# EAGLE board Configurable_RC_Filter-Panel (EAGLE 9.5.2), part 1 of 2
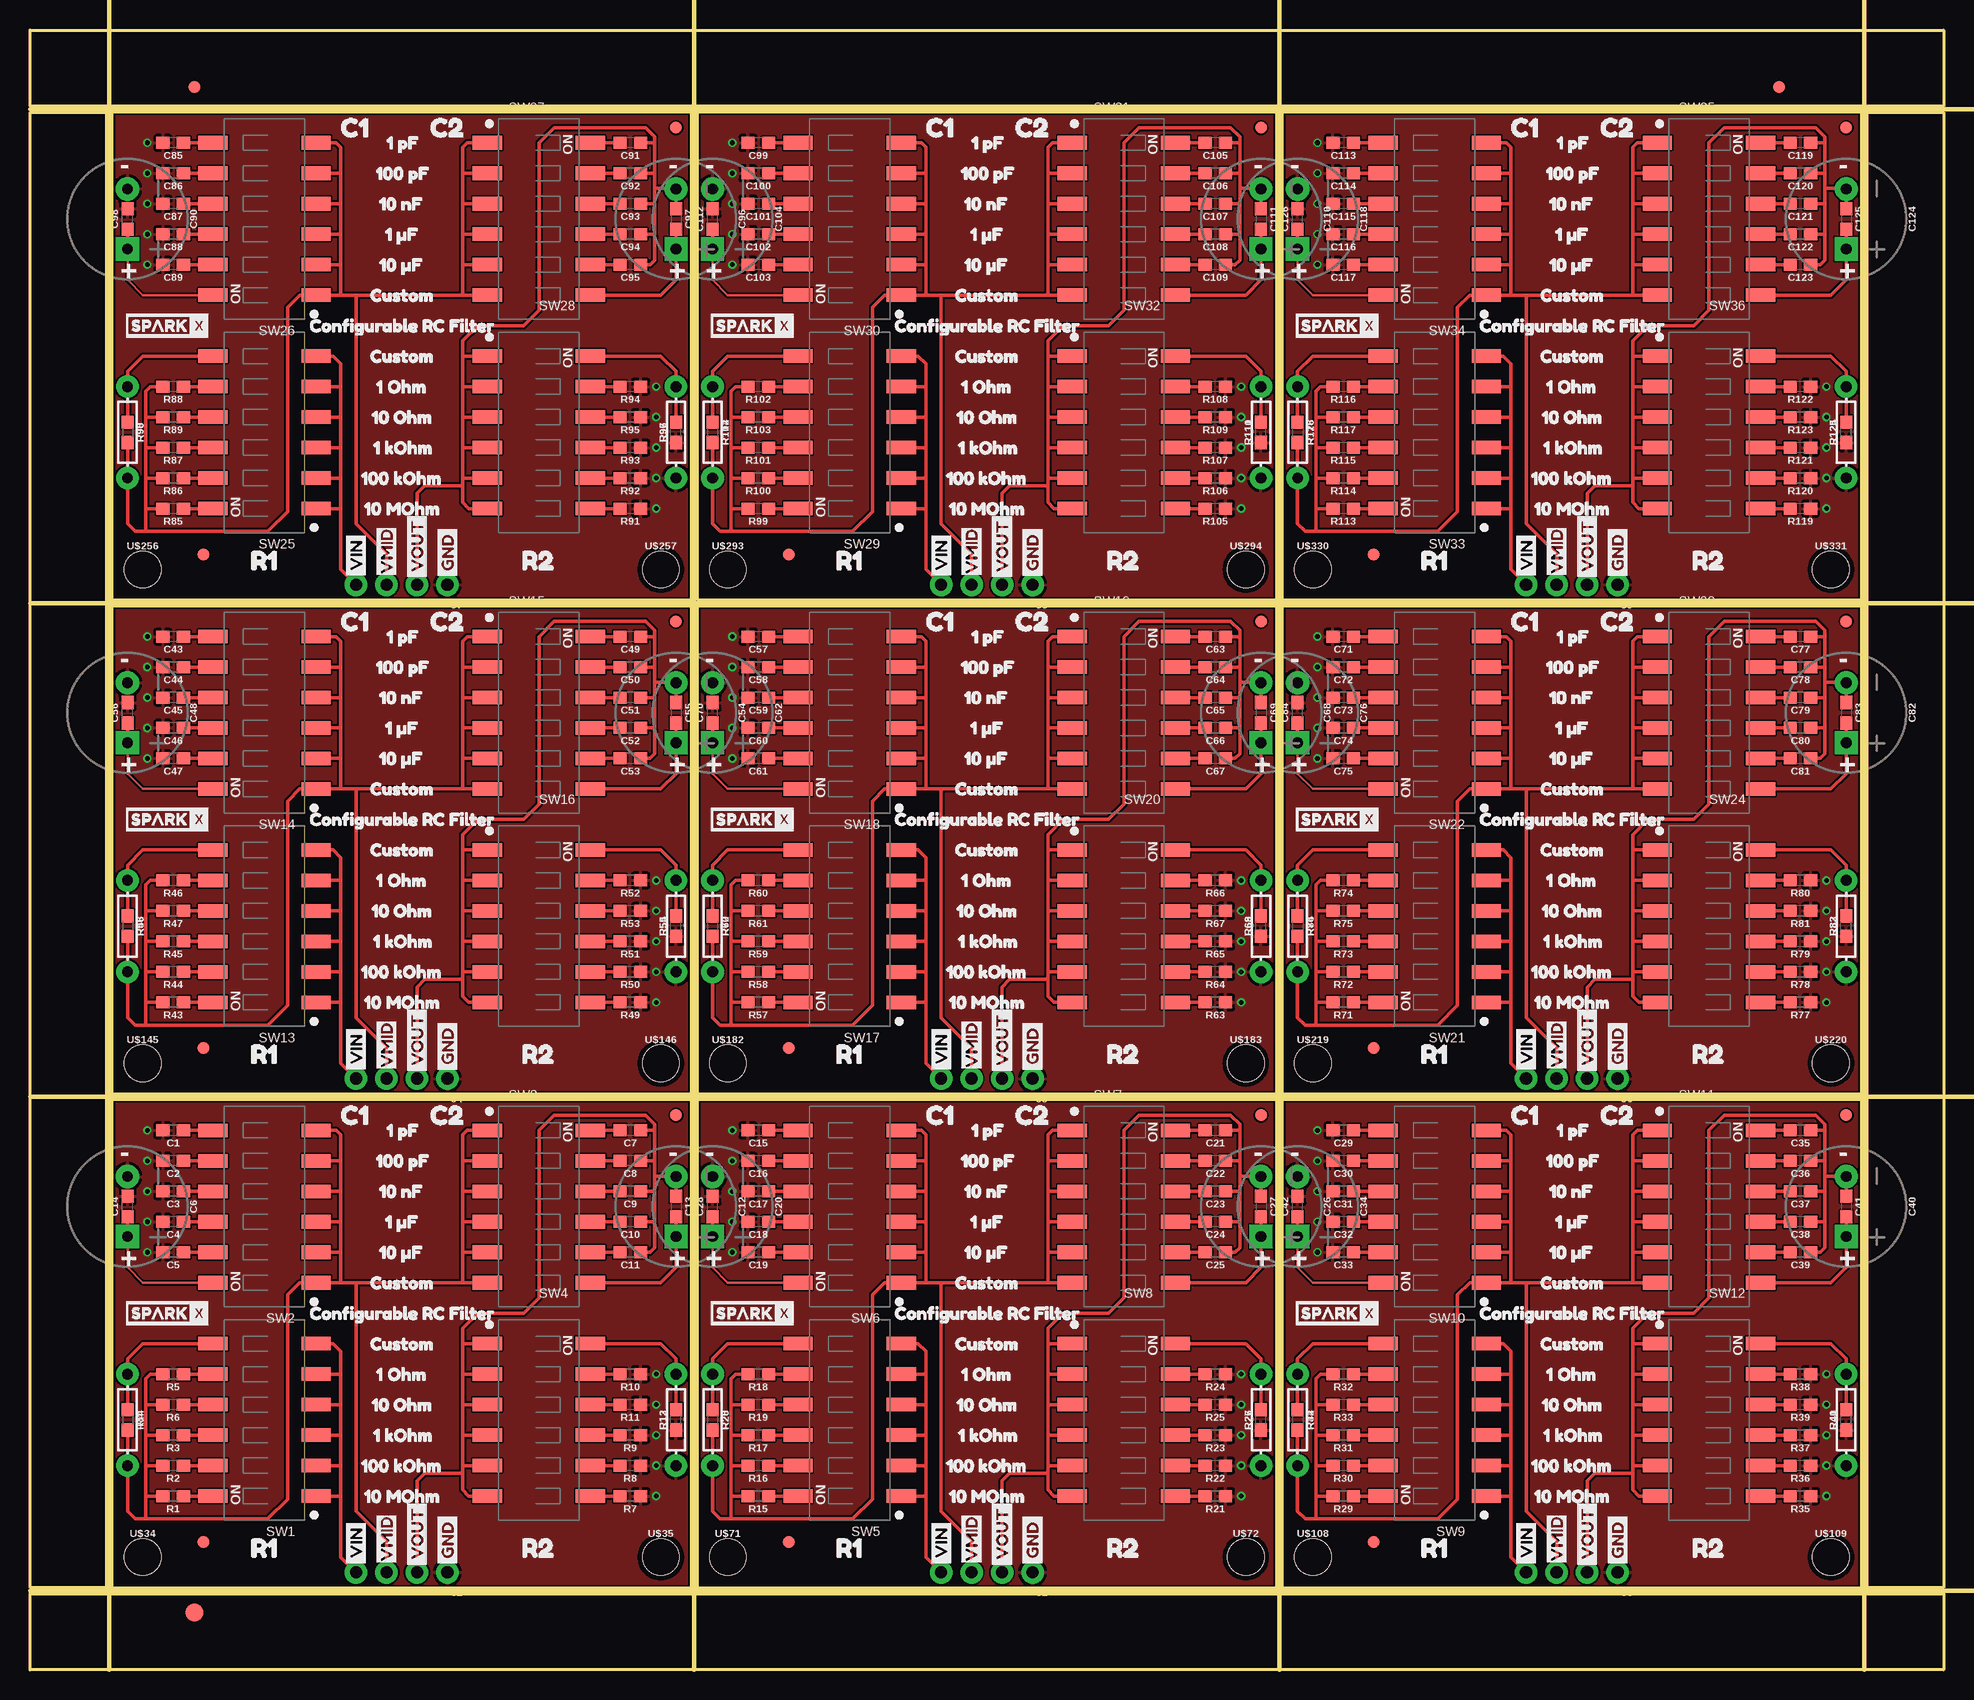
[diagram p0: board, top side]
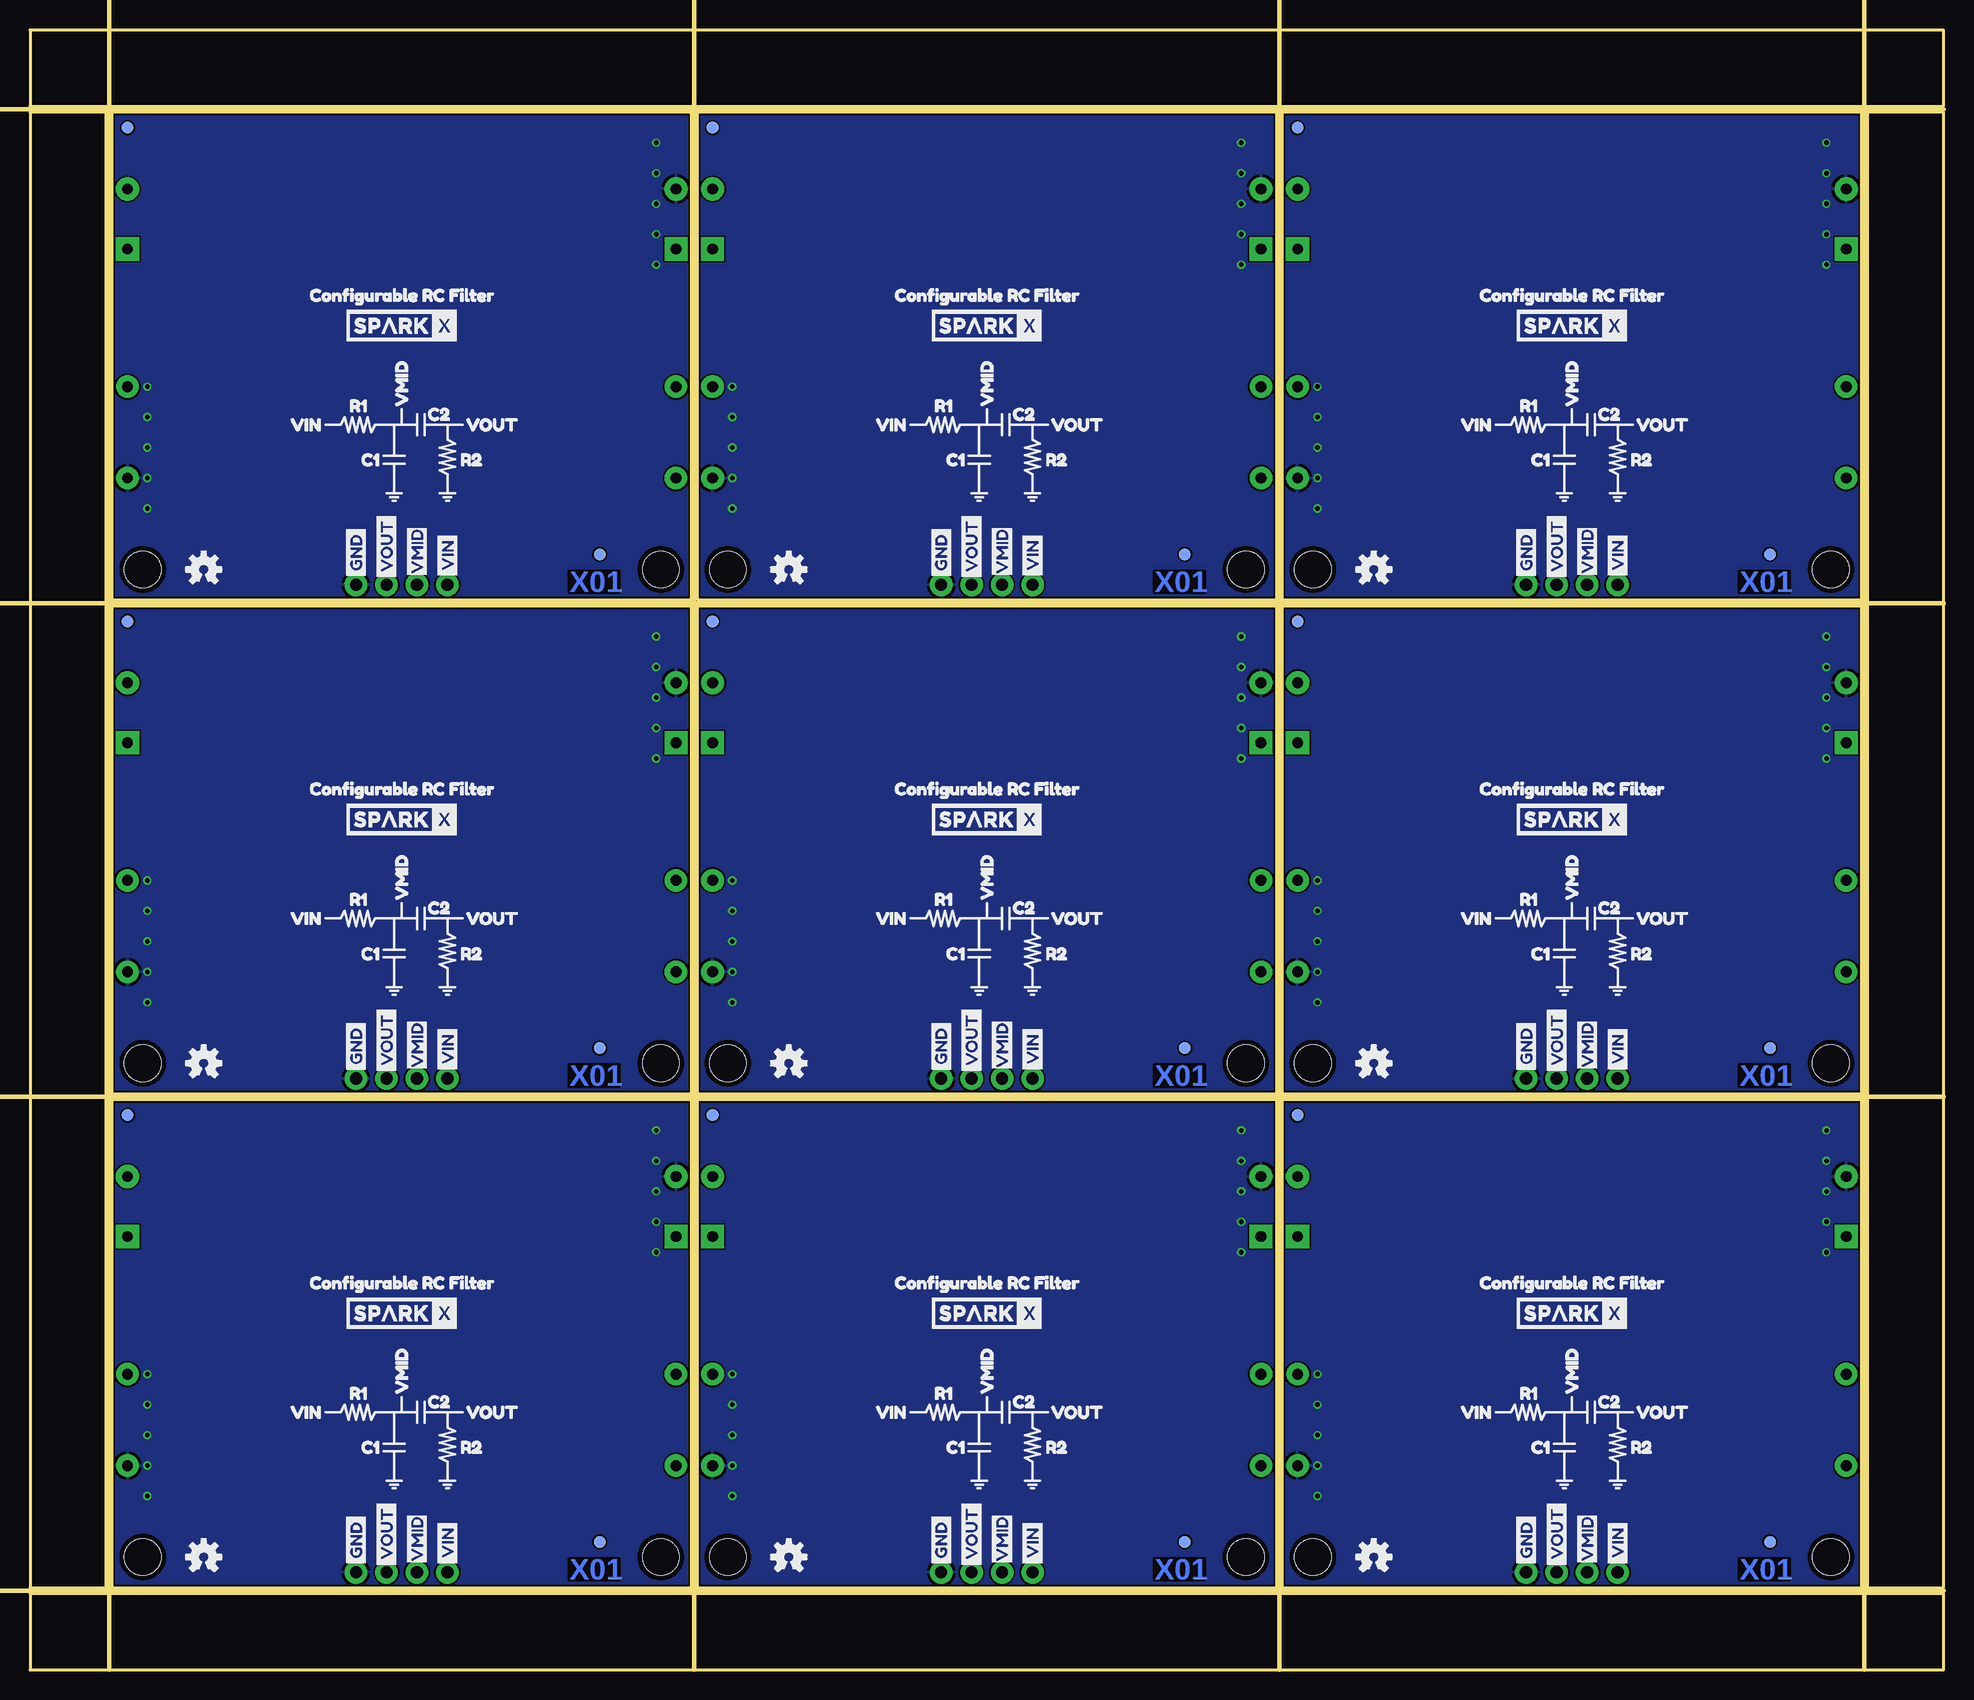
[diagram p1: board, bottom side, seen from below]

Size 159.51 x 136.65 mm. Coordinates in mm from the lower left corner, seen from the top.
Outline: 6.86,6.86 55.12,6.86 55.12,47.5 6.87,47.5 6.86,6.86
Outline: 55.63,6.86 103.89,6.86 103.89,47.5 55.64,47.5 55.63,6.86
Outline: 104.39,6.86 152.65,6.86 152.65,47.5 104.4,47.5 104.39,6.86
Outline: 6.86,48.01 55.12,48.01 55.12,88.65 6.87,88.65 6.86,48.01
Outline: 55.63,48.01 103.89,48.01 103.89,88.65 55.64,88.65 55.63,48.01
Outline: 104.39,48.01 152.65,48.01 152.65,88.65 104.4,88.65 104.39,48.01
Outline: 6.86,89.15 55.12,89.15 55.12,129.79 6.87,129.79 6.86,89.15
Outline: 55.63,89.15 103.89,89.15 103.89,129.79 55.64,129.79 55.63,89.15
Outline: 104.39,89.15 152.65,89.15 152.65,129.79 104.4,129.79 104.39,89.15
Outline: 0,6.35 159.51,6.35 159.51,0 0,0 0,6.35
Outline: 153.16,129.79 159.51,129.79 159.51,6.86 153.16,6.86 153.16,129.79
Outline: 0,136.65 159.51,136.65 159.51,130.3 0,130.3 0,136.65
Outline: 0,129.79 6.35,129.79 6.35,6.86 0,6.86 0,129.79
Copper layers (1*16): Top 0.035mm / dielectric 1.5mm / Bottom 0.035mm
Design rules "SparkFun-2-layer-PCBWay-LIMIT": minimum track width 6mil, minimum drill 0.3mm, track to track 6mil, track to pad 6mil, pad to pad 6mil, via to via 6mil, smd to smd 6mil, copper to edge 6mil, drill to drill 6mil, minimum pad ring 6mil, minimum via ring 6mil, stop-mask expansion 4mil, vias tented up to drill 25mil, thermal gap 10mil
Milling: 8 lines

## Footprints (pad centres in the part's own frame; a part is rotated, then mirrored left to right if it is on the bottom)
0603 = smd 1.1 x 1: 1 -0.85,0; 2 0.85,0
CPOL-RADIAL-5MM-10MM-NS = drill 0.9 pad 1.93 square: + 2.5,0 | drill 0.9 pad 1.93: - -2.5,0
FIDUCIAL-1X2 = smd 1 x 1: 1 0,0
FIDUCIAL-1.5X3 = smd 1.5 x 1.5: 1 0,0
1X04_NO_SILK = drill 1.016 pad 1.88: 1 0,0; 2 2.54,0; 3 5.08,0; 4 7.62,0
AXIAL-0.3 = drill 0.9 pad 1.88: P$1 -3.81,0; P$2 3.81,0
DIPSWITCH-06-SMD = smd 1.13 x 2.44: 1 -6.35,-4.3; 2 -3.81,-4.3; 3 -1.27,-4.3; 4 1.27,-4.3; 5 3.81,-4.3; 6 6.35,-4.3; 7 6.35,4.3; 8 3.81,4.3; 9 1.27,4.3; 10 -1.27,4.3; 11 -3.81,4.3; 12 -6.35,4.3
STAND-OFF-TIGHT = hole 3.048: 0,0

## Placement (x,y rotation side)
C1  1.0pF  [0603]  11.94,44.96 180 top
C2  100pF  [0603]  11.94,42.42 180 top
C3  10nF  [0603]  11.94,39.88 180 top
C4  1.0uF  [0603]  11.94,37.34 180 top
C5  10uF  [0603]  11.94,34.8 180 top
C6  1000UF-RADIAL-5MM-25V-20%-NO-SILK  [CPOL-RADIAL-5MM-10MM-NS]  8.13,38.61 270 top
C7  1.0pF  [0603]  50.04,44.96 180 top
C8  100pF  [0603]  50.04,42.42 180 top
C9  10nF  [0603]  50.04,39.88 180 top
C10  1.0uF  [0603]  50.04,37.34 180 top
C11  10uF  [0603]  50.04,34.8 180 top
C12  1000UF-RADIAL-5MM-25V-20%-NO-SILK  [CPOL-RADIAL-5MM-10MM-NS]  53.85,38.61 270 top
C13  [0603]  53.85,38.61 270 top
C14  [0603]  8.13,38.61 90 top
C15  1.0pF  [0603]  60.71,44.96 180 top
C16  100pF  [0603]  60.71,42.42 180 top
C17  10nF  [0603]  60.71,39.88 180 top
C18  1.0uF  [0603]  60.71,37.34 180 top
C19  10uF  [0603]  60.71,34.8 180 top
C20  1000UF-RADIAL-5MM-25V-20%-NO-SILK  [CPOL-RADIAL-5MM-10MM-NS]  56.9,38.61 270 top
C21  1.0pF  [0603]  98.81,44.96 180 top
C22  100pF  [0603]  98.81,42.42 180 top
C23  10nF  [0603]  98.81,39.88 180 top
C24  1.0uF  [0603]  98.81,37.34 180 top
C25  10uF  [0603]  98.81,34.8 180 top
C26  1000UF-RADIAL-5MM-25V-20%-NO-SILK  [CPOL-RADIAL-5MM-10MM-NS]  102.62,38.61 270 top
C27  [0603]  102.62,38.61 270 top
C28  [0603]  56.9,38.61 90 top
C29  1.0pF  [0603]  109.47,44.96 180 top
C30  100pF  [0603]  109.47,42.42 180 top
C31  10nF  [0603]  109.47,39.88 180 top
C32  1.0uF  [0603]  109.47,37.34 180 top
C33  10uF  [0603]  109.47,34.8 180 top
C34  1000UF-RADIAL-5MM-25V-20%-NO-SILK  [CPOL-RADIAL-5MM-10MM-NS]  105.66,38.61 270 top
C35  1.0pF  [0603]  147.57,44.96 180 top
C36  100pF  [0603]  147.57,42.42 180 top
C37  10nF  [0603]  147.57,39.88 180 top
C38  1.0uF  [0603]  147.57,37.34 180 top
C39  10uF  [0603]  147.57,34.8 180 top
C40  1000UF-RADIAL-5MM-25V-20%-NO-SILK  [CPOL-RADIAL-5MM-10MM-NS]  151.38,38.61 270 top
C41  [0603]  151.38,38.61 270 top
C42  [0603]  105.66,38.61 90 top
C43  1.0pF  [0603]  11.94,86.11 180 top
C44  100pF  [0603]  11.94,83.57 180 top
C45  10nF  [0603]  11.94,81.03 180 top
C46  1.0uF  [0603]  11.94,78.49 180 top
C47  10uF  [0603]  11.94,75.95 180 top
C48  1000UF-RADIAL-5MM-25V-20%-NO-SILK  [CPOL-RADIAL-5MM-10MM-NS]  8.13,79.76 270 top
C49  1.0pF  [0603]  50.04,86.11 180 top
C50  100pF  [0603]  50.04,83.57 180 top
C51  10nF  [0603]  50.04,81.03 180 top
C52  1.0uF  [0603]  50.04,78.49 180 top
C53  10uF  [0603]  50.04,75.95 180 top
C54  1000UF-RADIAL-5MM-25V-20%-NO-SILK  [CPOL-RADIAL-5MM-10MM-NS]  53.85,79.76 270 top
C55  [0603]  53.85,79.76 270 top
C56  [0603]  8.13,79.76 90 top
C57  1.0pF  [0603]  60.71,86.11 180 top
C58  100pF  [0603]  60.71,83.57 180 top
C59  10nF  [0603]  60.71,81.03 180 top
C60  1.0uF  [0603]  60.71,78.49 180 top
C61  10uF  [0603]  60.71,75.95 180 top
C62  1000UF-RADIAL-5MM-25V-20%-NO-SILK  [CPOL-RADIAL-5MM-10MM-NS]  56.9,79.76 270 top
C63  1.0pF  [0603]  98.81,86.11 180 top
C64  100pF  [0603]  98.81,83.57 180 top
C65  10nF  [0603]  98.81,81.03 180 top
C66  1.0uF  [0603]  98.81,78.49 180 top
C67  10uF  [0603]  98.81,75.95 180 top
C68  1000UF-RADIAL-5MM-25V-20%-NO-SILK  [CPOL-RADIAL-5MM-10MM-NS]  102.62,79.76 270 top
C69  [0603]  102.62,79.76 270 top
C70  [0603]  56.9,79.76 90 top
C71  1.0pF  [0603]  109.47,86.11 180 top
C72  100pF  [0603]  109.47,83.57 180 top
C73  10nF  [0603]  109.47,81.03 180 top
C74  1.0uF  [0603]  109.47,78.49 180 top
C75  10uF  [0603]  109.47,75.95 180 top
C76  1000UF-RADIAL-5MM-25V-20%-NO-SILK  [CPOL-RADIAL-5MM-10MM-NS]  105.66,79.76 270 top
C77  1.0pF  [0603]  147.57,86.11 180 top
C78  100pF  [0603]  147.57,83.57 180 top
C79  10nF  [0603]  147.57,81.03 180 top
C80  1.0uF  [0603]  147.57,78.49 180 top
C81  10uF  [0603]  147.57,75.95 180 top
C82  1000UF-RADIAL-5MM-25V-20%-NO-SILK  [CPOL-RADIAL-5MM-10MM-NS]  151.38,79.76 270 top
C83  [0603]  151.38,79.76 270 top
C84  [0603]  105.66,79.76 90 top
C85  1.0pF  [0603]  11.94,127.25 180 top
C86  100pF  [0603]  11.94,124.71 180 top
C87  10nF  [0603]  11.94,122.17 180 top
C88  1.0uF  [0603]  11.94,119.63 180 top
C89  10uF  [0603]  11.94,117.09 180 top
C90  1000UF-RADIAL-5MM-25V-20%-NO-SILK  [CPOL-RADIAL-5MM-10MM-NS]  8.13,120.9 270 top
C91  1.0pF  [0603]  50.04,127.25 180 top
C92  100pF  [0603]  50.04,124.71 180 top
C93  10nF  [0603]  50.04,122.17 180 top
C94  1.0uF  [0603]  50.04,119.63 180 top
C95  10uF  [0603]  50.04,117.09 180 top
C96  1000UF-RADIAL-5MM-25V-20%-NO-SILK  [CPOL-RADIAL-5MM-10MM-NS]  53.85,120.9 270 top
C97  [0603]  53.85,120.9 270 top
C98  [0603]  8.13,120.9 90 top
C99  1.0pF  [0603]  60.71,127.25 180 top
C100  100pF  [0603]  60.71,124.71 180 top
C101  10nF  [0603]  60.71,122.17 180 top
C102  1.0uF  [0603]  60.71,119.63 180 top
C103  10uF  [0603]  60.71,117.09 180 top
C104  1000UF-RADIAL-5MM-25V-20%-NO-SILK  [CPOL-RADIAL-5MM-10MM-NS]  56.9,120.9 270 top
C105  1.0pF  [0603]  98.81,127.25 180 top
C106  100pF  [0603]  98.81,124.71 180 top
C107  10nF  [0603]  98.81,122.17 180 top
C108  1.0uF  [0603]  98.81,119.63 180 top
C109  10uF  [0603]  98.81,117.09 180 top
C110  1000UF-RADIAL-5MM-25V-20%-NO-SILK  [CPOL-RADIAL-5MM-10MM-NS]  102.62,120.9 270 top
C111  [0603]  102.62,120.9 270 top
C112  [0603]  56.9,120.9 90 top
C113  1.0pF  [0603]  109.47,127.25 180 top
C114  100pF  [0603]  109.47,124.71 180 top
C115  10nF  [0603]  109.47,122.17 180 top
C116  1.0uF  [0603]  109.47,119.63 180 top
C117  10uF  [0603]  109.47,117.09 180 top
C118  1000UF-RADIAL-5MM-25V-20%-NO-SILK  [CPOL-RADIAL-5MM-10MM-NS]  105.66,120.9 270 top
C119  1.0pF  [0603]  147.57,127.25 180 top
C120  100pF  [0603]  147.57,124.71 180 top
C121  10nF  [0603]  147.57,122.17 180 top
C122  1.0uF  [0603]  147.57,119.63 180 top
C123  10uF  [0603]  147.57,117.09 180 top
C124  1000UF-RADIAL-5MM-25V-20%-NO-SILK  [CPOL-RADIAL-5MM-10MM-NS]  151.38,120.9 270 top
C125  [0603]  151.38,120.9 270 top
C126  [0603]  105.66,120.9 90 top
E$1  [FIDUCIAL-1X2]  13.72,131.89 0 top
E$2  [FIDUCIAL-1X2]  145.8,131.89 0 top
E$3  [FIDUCIAL-1.5X3]  13.72,4.76 0 top
FD1  FIDUCIAL1X2  [FIDUCIAL-1X2]  14.48,10.67 0 top
FD2  FIDUCIAL1X2  [FIDUCIAL-1X2]  14.48,10.67 0 bottom
FD3  FIDUCIAL1X2  [FIDUCIAL-1X2]  53.85,46.23 0 top
FD4  FIDUCIAL1X2  [FIDUCIAL-1X2]  53.85,46.23 0 bottom
FD5  FIDUCIAL1X2  [FIDUCIAL-1X2]  63.25,10.67 0 top
FD6  FIDUCIAL1X2  [FIDUCIAL-1X2]  63.25,10.67 0 bottom
FD7  FIDUCIAL1X2  [FIDUCIAL-1X2]  102.62,46.23 0 top
FD8  FIDUCIAL1X2  [FIDUCIAL-1X2]  102.62,46.23 0 bottom
FD9  FIDUCIAL1X2  [FIDUCIAL-1X2]  112.01,10.67 0 top
FD10  FIDUCIAL1X2  [FIDUCIAL-1X2]  112.01,10.67 0 bottom
FD11  FIDUCIAL1X2  [FIDUCIAL-1X2]  151.38,46.23 0 top
FD12  FIDUCIAL1X2  [FIDUCIAL-1X2]  151.38,46.23 0 bottom
FD13  FIDUCIAL1X2  [FIDUCIAL-1X2]  14.48,51.82 0 top
FD14  FIDUCIAL1X2  [FIDUCIAL-1X2]  14.48,51.82 0 bottom
FD15  FIDUCIAL1X2  [FIDUCIAL-1X2]  53.85,87.38 0 top
FD16  FIDUCIAL1X2  [FIDUCIAL-1X2]  53.85,87.38 0 bottom
FD17  FIDUCIAL1X2  [FIDUCIAL-1X2]  63.25,51.82 0 top
FD18  FIDUCIAL1X2  [FIDUCIAL-1X2]  63.25,51.82 0 bottom
FD19  FIDUCIAL1X2  [FIDUCIAL-1X2]  102.62,87.38 0 top
FD20  FIDUCIAL1X2  [FIDUCIAL-1X2]  102.62,87.38 0 bottom
FD21  FIDUCIAL1X2  [FIDUCIAL-1X2]  112.01,51.82 0 top
FD22  FIDUCIAL1X2  [FIDUCIAL-1X2]  112.01,51.82 0 bottom
FD23  FIDUCIAL1X2  [FIDUCIAL-1X2]  151.38,87.38 0 top
FD24  FIDUCIAL1X2  [FIDUCIAL-1X2]  151.38,87.38 0 bottom
FD25  FIDUCIAL1X2  [FIDUCIAL-1X2]  14.48,92.96 0 top
FD26  FIDUCIAL1X2  [FIDUCIAL-1X2]  14.48,92.96 0 bottom
FD27  FIDUCIAL1X2  [FIDUCIAL-1X2]  53.85,128.52 0 top
FD28  FIDUCIAL1X2  [FIDUCIAL-1X2]  53.85,128.52 0 bottom
FD29  FIDUCIAL1X2  [FIDUCIAL-1X2]  63.25,92.96 0 top
FD30  FIDUCIAL1X2  [FIDUCIAL-1X2]  63.25,92.96 0 bottom
FD31  FIDUCIAL1X2  [FIDUCIAL-1X2]  102.62,128.52 0 top
FD32  FIDUCIAL1X2  [FIDUCIAL-1X2]  102.62,128.52 0 bottom
FD33  FIDUCIAL1X2  [FIDUCIAL-1X2]  112.01,92.96 0 top
FD34  FIDUCIAL1X2  [FIDUCIAL-1X2]  112.01,92.96 0 bottom
FD35  FIDUCIAL1X2  [FIDUCIAL-1X2]  151.38,128.52 0 top
FD36  FIDUCIAL1X2  [FIDUCIAL-1X2]  151.38,128.52 0 bottom
J1  [1X04_NO_SILK]  34.8,8.13 180 top
J2  [1X04_NO_SILK]  83.57,8.13 180 top
J3  [1X04_NO_SILK]  132.33,8.13 180 top
J4  [1X04_NO_SILK]  34.8,49.28 180 top
J5  [1X04_NO_SILK]  83.57,49.28 180 top
J6  [1X04_NO_SILK]  132.33,49.28 180 top
J7  [1X04_NO_SILK]  34.8,90.42 180 top
J8  [1X04_NO_SILK]  83.57,90.42 180 top
J9  [1X04_NO_SILK]  132.33,90.42 180 top
LOGO1  OSHW-LOGOS  [OSHW-LOGO-S]  47.5,9.4 0 bottom
LOGO2  OSHW-LOGOS  [OSHW-LOGO-S]  96.27,9.4 0 bottom
LOGO3  OSHW-LOGOS  [OSHW-LOGO-S]  145.03,9.4 0 bottom
LOGO4  OSHW-LOGOS  [OSHW-LOGO-S]  47.5,50.55 0 bottom
LOGO5  OSHW-LOGOS  [OSHW-LOGO-S]  96.27,50.55 0 bottom
LOGO6  OSHW-LOGOS  [OSHW-LOGO-S]  145.03,50.55 0 bottom
LOGO7  OSHW-LOGOS  [OSHW-LOGO-S]  47.5,91.69 0 bottom
LOGO8  OSHW-LOGOS  [OSHW-LOGO-S]  96.27,91.69 0 bottom
LOGO9  OSHW-LOGOS  [OSHW-LOGO-S]  145.03,91.69 0 bottom
R1  10M  [0603]  11.94,14.48 180 top
R2  100k  [0603]  11.94,17.02 180 top
R3  1k  [0603]  11.94,19.56 180 top
R4  [AXIAL-0.3]  8.13,20.83 270 top
R5  1  [0603]  11.94,24.64 180 top
R6  10  [0603]  11.94,22.1 180 top
R7  10M  [0603]  50.04,14.48 180 top
R8  100k  [0603]  50.04,17.02 180 top
R9  1k  [0603]  50.04,19.56 180 top
R10  1  [0603]  50.04,24.64 180 top
R11  10  [0603]  50.04,22.1 180 top
R12  [AXIAL-0.3]  53.85,20.83 90 top
R13  [0603]  53.85,20.83 90 top
R14  [0603]  8.13,20.83 270 top
R15  10M  [0603]  60.71,14.48 180 top
R16  100k  [0603]  60.71,17.02 180 top
R17  1k  [0603]  60.71,19.56 180 top
R18  1  [0603]  60.71,24.64 180 top
R19  10  [0603]  60.71,22.1 180 top
R20  [AXIAL-0.3]  56.9,20.83 270 top
R21  10M  [0603]  98.81,14.48 180 top
R22  100k  [0603]  98.81,17.02 180 top
R23  1k  [0603]  98.81,19.56 180 top
R24  1  [0603]  98.81,24.64 180 top
R25  10  [0603]  98.81,22.1 180 top
R26  [AXIAL-0.3]  102.62,20.83 90 top
R27  [0603]  102.62,20.83 90 top
R28  [0603]  56.9,20.83 270 top
R29  10M  [0603]  109.47,14.48 180 top
R30  100k  [0603]  109.47,17.02 180 top
R31  1k  [0603]  109.47,19.56 180 top
R32  1  [0603]  109.47,24.64 180 top
R33  10  [0603]  109.47,22.1 180 top
R34  [AXIAL-0.3]  105.66,20.83 270 top
R35  10M  [0603]  147.57,14.48 180 top
R36  100k  [0603]  147.57,17.02 180 top
R37  1k  [0603]  147.57,19.56 180 top
R38  1  [0603]  147.57,24.64 180 top
R39  10  [0603]  147.57,22.1 180 top
R40  [AXIAL-0.3]  151.38,20.83 90 top
R41  [0603]  151.38,20.83 90 top
R42  [0603]  105.66,20.83 270 top
R43  10M  [0603]  11.94,55.63 180 top
R44  100k  [0603]  11.94,58.17 180 top
R45  1k  [0603]  11.94,60.71 180 top
R46  1  [0603]  11.94,65.79 180 top
R47  10  [0603]  11.94,63.25 180 top
R48  [AXIAL-0.3]  8.13,61.98 270 top
R49  10M  [0603]  50.04,55.63 180 top
R50  100k  [0603]  50.04,58.17 180 top
R51  1k  [0603]  50.04,60.71 180 top
R52  1  [0603]  50.04,65.79 180 top
R53  10  [0603]  50.04,63.25 180 top
R54  [AXIAL-0.3]  53.85,61.98 90 top
R55  [0603]  53.85,61.98 90 top
R56  [0603]  8.13,61.98 270 top
R57  10M  [0603]  60.71,55.63 180 top
R58  100k  [0603]  60.71,58.17 180 top
R59  1k  [0603]  60.71,60.71 180 top
R60  1  [0603]  60.71,65.79 180 top
R61  10  [0603]  60.71,63.25 180 top
R62  [AXIAL-0.3]  56.9,61.98 270 top
R63  10M  [0603]  98.81,55.63 180 top
R64  100k  [0603]  98.81,58.17 180 top
R65  1k  [0603]  98.81,60.71 180 top
R66  1  [0603]  98.81,65.79 180 top
R67  10  [0603]  98.81,63.25 180 top
R68  [AXIAL-0.3]  102.62,61.98 90 top
R69  [0603]  102.62,61.98 90 top
R70  [0603]  56.9,61.98 270 top
R71  10M  [0603]  109.47,55.63 180 top
R72  100k  [0603]  109.47,58.17 180 top
R73  1k  [0603]  109.47,60.71 180 top
R74  1  [0603]  109.47,65.79 180 top
R75  10  [0603]  109.47,63.25 180 top
R76  [AXIAL-0.3]  105.66,61.98 270 top
R77  10M  [0603]  147.57,55.63 180 top
R78  100k  [0603]  147.57,58.17 180 top
R79  1k  [0603]  147.57,60.71 180 top
R80  1  [0603]  147.57,65.79 180 top
R81  10  [0603]  147.57,63.25 180 top
R82  [AXIAL-0.3]  151.38,61.98 90 top
R83  [0603]  151.38,61.98 90 top
R84  [0603]  105.66,61.98 270 top
R85  10M  [0603]  11.94,96.77 180 top
R86  100k  [0603]  11.94,99.31 180 top
R87  1k  [0603]  11.94,101.85 180 top
R88  1  [0603]  11.94,106.93 180 top
R89  10  [0603]  11.94,104.39 180 top
R90  [AXIAL-0.3]  8.13,103.12 270 top
R91  10M  [0603]  50.04,96.77 180 top
R92  100k  [0603]  50.04,99.31 180 top
R93  1k  [0603]  50.04,101.85 180 top
R94  1  [0603]  50.04,106.93 180 top
R95  10  [0603]  50.04,104.39 180 top
R96  [AXIAL-0.3]  53.85,103.12 90 top
R97  [0603]  53.85,103.12 90 top
R98  [0603]  8.13,103.12 270 top
R99  10M  [0603]  60.71,96.77 180 top
R100  100k  [0603]  60.71,99.31 180 top
R101  1k  [0603]  60.71,101.85 180 top
R102  1  [0603]  60.71,106.93 180 top
R103  10  [0603]  60.71,104.39 180 top
R104  [AXIAL-0.3]  56.9,103.12 270 top
R105  10M  [0603]  98.81,96.77 180 top
R106  100k  [0603]  98.81,99.31 180 top
R107  1k  [0603]  98.81,101.85 180 top
R108  1  [0603]  98.81,106.93 180 top
R109  10  [0603]  98.81,104.39 180 top
R110  [AXIAL-0.3]  102.62,103.12 90 top
R111  [0603]  102.62,103.12 90 top
R112  [0603]  56.9,103.12 270 top
R113  10M  [0603]  109.47,96.77 180 top
R114  100k  [0603]  109.47,99.31 180 top
R115  1k  [0603]  109.47,101.85 180 top
R116  1  [0603]  109.47,106.93 180 top
R117  10  [0603]  109.47,104.39 180 top
R118  [AXIAL-0.3]  105.66,103.12 270 top
R119  10M  [0603]  147.57,96.77 180 top
R120  100k  [0603]  147.57,99.31 180 top
R121  1k  [0603]  147.57,101.85 180 top
R122  1  [0603]  147.57,106.93 180 top
R123  10  [0603]  147.57,104.39 180 top
R124  [AXIAL-0.3]  151.38,103.12 90 top
R125  [0603]  151.38,103.12 90 top
R126  [0603]  105.66,103.12 270 top
SW1  DIP-06  [DIPSWITCH-06-SMD]  19.56,20.83 90 top
SW2  DIP-06  [DIPSWITCH-06-SMD]  19.56,38.61 90 top
SW3  DIP-06  [DIPSWITCH-06-SMD]  42.42,38.61 270 top
SW4  DIP-06  [DIPSWITCH-06-SMD]  42.42,20.83 270 top
SW5  DIP-06  [DIPSWITCH-06-SMD]  68.33,20.83 90 top
SW6  DIP-06  [DIPSWITCH-06-SMD]  68.33,38.61 90 top
SW7  DIP-06  [DIPSWITCH-06-SMD]  91.19,38.61 270 top
SW8  DIP-06  [DIPSWITCH-06-SMD]  91.19,20.83 270 top
SW9  DIP-06  [DIPSWITCH-06-SMD]  117.09,20.83 90 top
SW10  DIP-06  [DIPSWITCH-06-SMD]  117.09,38.61 90 top
SW11  DIP-06  [DIPSWITCH-06-SMD]  139.95,38.61 270 top
SW12  DIP-06  [DIPSWITCH-06-SMD]  139.95,20.83 270 top
SW13  DIP-06  [DIPSWITCH-06-SMD]  19.56,61.98 90 top
SW14  DIP-06  [DIPSWITCH-06-SMD]  19.56,79.76 90 top
SW15  DIP-06  [DIPSWITCH-06-SMD]  42.42,79.76 270 top
SW16  DIP-06  [DIPSWITCH-06-SMD]  42.42,61.98 270 top
SW17  DIP-06  [DIPSWITCH-06-SMD]  68.33,61.98 90 top
SW18  DIP-06  [DIPSWITCH-06-SMD]  68.33,79.76 90 top
SW19  DIP-06  [DIPSWITCH-06-SMD]  91.19,79.76 270 top
SW20  DIP-06  [DIPSWITCH-06-SMD]  91.19,61.98 270 top
SW21  DIP-06  [DIPSWITCH-06-SMD]  117.09,61.98 90 top
SW22  DIP-06  [DIPSWITCH-06-SMD]  117.09,79.76 90 top
SW23  DIP-06  [DIPSWITCH-06-SMD]  139.95,79.76 270 top
SW24  DIP-06  [DIPSWITCH-06-SMD]  139.95,61.98 270 top
SW25  DIP-06  [DIPSWITCH-06-SMD]  19.56,103.12 90 top
SW26  DIP-06  [DIPSWITCH-06-SMD]  19.56,120.9 90 top
SW27  DIP-06  [DIPSWITCH-06-SMD]  42.42,120.9 270 top
SW28  DIP-06  [DIPSWITCH-06-SMD]  42.42,103.12 270 top
SW29  DIP-06  [DIPSWITCH-06-SMD]  68.33,103.12 90 top
SW30  DIP-06  [DIPSWITCH-06-SMD]  68.33,120.9 90 top
SW31  DIP-06  [DIPSWITCH-06-SMD]  91.19,120.9 270 top
SW32  DIP-06  [DIPSWITCH-06-SMD]  91.19,103.12 270 top
SW33  DIP-06  [DIPSWITCH-06-SMD]  117.09,103.12 90 top
SW34  DIP-06  [DIPSWITCH-06-SMD]  117.09,120.9 90 top
SW35  DIP-06  [DIPSWITCH-06-SMD]  139.95,120.9 270 top
SW36  DIP-06  [DIPSWITCH-06-SMD]  139.95,103.12 270 top
U$1  [1_#F9]  28.7,37.34 0 top
U$2  [1_KOHM7]  27.69,19.56 0 top
U$3  [10_#F8]  28.19,34.8 0 top
U$4  [10_MOHM6]  26.92,14.48 0 top
U$5  [GND0]  34.8,8.38 90 top
U$6  [GND0]  34.8,8.38 90 bottom
U$7  [VIN1]  27.18,8.38 90 top
U$8  [VIN1]  27.18,8.38 90 bottom
U$9  [VMID3]  29.72,8.13 90 top
U$10  [VMID3]  29.72,8.13 90 bottom
U$11  [VOUT3]  32.26,8.25 90 top
U$12  [VOUT3]  32.26,8.25 90 bottom
U$13  [10_NF11]  28.19,39.88 0 top
U$14  [10_OHM4]  27.56,22.1 0 top
U$15  [100_KOHM10]  26.67,17.02 0 top
U$16  [C10]  24.51,46.23 0 top
U$17  [C21]  32,46.23 0 top
U$18  [R12]  17.02,10.16 0 top
U$19  [R23]  39.62,10.16 0 top
U$20  [_1_OHM5]  27.56,24.64 0 top
U$21  [_1_PF13]  28.45,44.96 0 top
U$22  [_100_PF12]  27.56,42.42 0 top
U$23  [CUSTOM3]  27.43,27.18 0 top
U$24  [CUSTOM3]  27.43,32.26 0 top
U$25  [C11]  35.31,18.54 0 bottom
U$26  [C20]  29.72,22.35 0 bottom
U$27  [R12]  36.26,23.05 0 bottom
U$28  [R23]  26.99,18.54 0 bottom
U$29  [VIN4]  41.15,21.46 0 bottom
U$30  [VMID5]  30.99,22.1 90 bottom
U$31  [VOUT6]  26.54,21.46 0 bottom
U$32  [CONFIGURABLE_RC_FILTER0]  22.42,29.72 0 top
U$33  [CONFIGURABLE_RC_FILTER0]  39.56,32.26 0 bottom
U$34  [STAND-OFF-TIGHT]  9.4,9.4 0 top
U$35  [STAND-OFF-TIGHT]  52.58,9.4 0 top
U$36  [SPARKX-SMALL]  11.43,29.72 0 top
U$37  [SPARKX-MEDIUM]  30.99,29.72 0 bottom
U$38  [1_#F9]  77.47,37.34 0 top
U$39  [1_KOHM7]  76.45,19.56 0 top
U$40  [10_#F8]  76.96,34.8 0 top
U$41  [10_MOHM6]  75.69,14.48 0 top
U$42  [GND0]  83.57,8.38 90 top
U$43  [GND0]  83.57,8.38 90 bottom
U$44  [VIN1]  75.95,8.38 90 top
U$45  [VIN1]  75.95,8.38 90 bottom
U$46  [VMID3]  78.49,8.13 90 top
U$47  [VMID3]  78.49,8.13 90 bottom
U$48  [VOUT3]  81.03,8.25 90 top
U$49  [VOUT3]  81.03,8.25 90 bottom
U$50  [10_NF11]  76.96,39.88 0 top
U$51  [10_OHM4]  76.33,22.1 0 top
U$52  [100_KOHM10]  75.44,17.02 0 top
U$53  [C10]  73.28,46.23 0 top
U$54  [C21]  80.77,46.23 0 top
U$55  [R12]  65.79,10.16 0 top
U$56  [R23]  88.39,10.16 0 top
U$57  [_1_OHM5]  76.33,24.64 0 top
U$58  [_1_PF13]  77.22,44.96 0 top
U$59  [_100_PF12]  76.33,42.42 0 top
U$60  [CUSTOM3]  76.2,27.18 0 top
U$61  [CUSTOM3]  76.2,32.26 0 top
U$62  [C11]  84.07,18.54 0 bottom
U$63  [C20]  78.49,22.35 0 bottom
U$64  [R12]  85.03,23.05 0 bottom
U$65  [R23]  75.76,18.54 0 bottom
U$66  [VIN4]  89.92,21.46 0 bottom
U$67  [VMID5]  79.76,22.1 90 bottom
U$68  [VOUT6]  75.31,21.46 0 bottom
U$69  [CONFIGURABLE_RC_FILTER0]  71.18,29.72 0 top
U$70  [CONFIGURABLE_RC_FILTER0]  88.33,32.26 0 bottom
U$71  [STAND-OFF-TIGHT]  58.17,9.4 0 top
U$72  [STAND-OFF-TIGHT]  101.35,9.4 0 top
U$73  [SPARKX-SMALL]  60.2,29.72 0 top
U$74  [SPARKX-MEDIUM]  79.76,29.72 0 bottom
U$75  [1_#F9]  126.24,37.34 0 top
U$76  [1_KOHM7]  125.22,19.56 0 top
U$77  [10_#F8]  125.73,34.8 0 top
U$78  [10_MOHM6]  124.46,14.48 0 top
U$79  [GND0]  132.33,8.38 90 top
U$80  [GND0]  132.33,8.38 90 bottom
U$81  [VIN1]  124.71,8.38 90 top
U$82  [VIN1]  124.71,8.38 90 bottom
U$83  [VMID3]  127.25,8.13 90 top
U$84  [VMID3]  127.25,8.13 90 bottom
U$85  [VOUT3]  129.79,8.25 90 top
U$86  [VOUT3]  129.79,8.25 90 bottom
U$87  [10_NF11]  125.73,39.88 0 top
U$88  [10_OHM4]  125.09,22.1 0 top
U$89  [100_KOHM10]  124.21,17.02 0 top
U$90  [C10]  122.05,46.23 0 top
U$91  [C21]  129.54,46.23 0 top
U$92  [R12]  114.55,10.16 0 top
U$93  [R23]  137.16,10.16 0 top
U$94  [_1_OHM5]  125.09,24.64 0 top
U$95  [_1_PF13]  125.98,44.96 0 top
U$96  [_100_PF12]  125.09,42.42 0 top
U$97  [CUSTOM3]  124.97,27.18 0 top
U$98  [CUSTOM3]  124.97,32.26 0 top
U$99  [C11]  132.84,18.54 0 bottom
U$100  [C20]  127.25,22.35 0 bottom
U$101  [R12]  133.79,23.05 0 bottom
U$102  [R23]  124.52,18.54 0 bottom
U$103  [VIN4]  138.68,21.46 0 bottom
U$104  [VMID5]  128.52,22.1 90 bottom
U$105  [VOUT6]  124.08,21.46 0 bottom
U$106  [CONFIGURABLE_RC_FILTER0]  119.95,29.72 0 top
U$107  [CONFIGURABLE_RC_FILTER0]  137.1,32.26 0 bottom
U$108  [STAND-OFF-TIGHT]  106.93,9.4 0 top
U$109  [STAND-OFF-TIGHT]  150.11,9.4 0 top
U$110  [SPARKX-SMALL]  108.97,29.72 0 top
U$111  [SPARKX-MEDIUM]  128.52,29.72 0 bottom
U$112  [1_#F9]  28.7,78.49 0 top
U$113  [1_KOHM7]  27.69,60.71 0 top
U$114  [10_#F8]  28.19,75.95 0 top
U$115  [10_MOHM6]  26.92,55.63 0 top
U$116  [GND0]  34.8,49.53 90 top
U$117  [GND0]  34.8,49.53 90 bottom
U$118  [VIN1]  27.18,49.53 90 top
U$119  [VIN1]  27.18,49.53 90 bottom
U$120  [VMID3]  29.72,49.28 90 top
U$121  [VMID3]  29.72,49.28 90 bottom
U$122  [VOUT3]  32.26,49.4 90 top
U$123  [VOUT3]  32.26,49.4 90 bottom
U$124  [10_NF11]  28.19,81.03 0 top
U$125  [10_OHM4]  27.56,63.25 0 top
U$126  [100_KOHM10]  26.67,58.17 0 top
U$127  [C10]  24.51,87.38 0 top
U$128  [C21]  32,87.38 0 top
U$129  [R12]  17.02,51.31 0 top
U$130  [R23]  39.62,51.31 0 top
U$131  [_1_OHM5]  27.56,65.79 0 top
U$132  [_1_PF13]  28.45,86.11 0 top
U$133  [_100_PF12]  27.56,83.57 0 top
U$134  [CUSTOM3]  27.43,68.33 0 top
U$135  [CUSTOM3]  27.43,73.41 0 top
U$136  [C11]  35.31,59.69 0 bottom
U$137  [C20]  29.72,63.5 0 bottom
U$138  [R12]  36.26,64.2 0 bottom
U$139  [R23]  26.99,59.69 0 bottom
U$140  [VIN4]  41.15,62.61 0 bottom
U$141  [VMID5]  30.99,63.25 90 bottom
U$142  [VOUT6]  26.54,62.61 0 bottom
U$143  [CONFIGURABLE_RC_FILTER0]  22.42,70.87 0 top
U$144  [CONFIGURABLE_RC_FILTER0]  39.56,73.41 0 bottom
U$145  [STAND-OFF-TIGHT]  9.4,50.55 0 top
U$146  [STAND-OFF-TIGHT]  52.58,50.55 0 top
U$147  [SPARKX-SMALL]  11.43,70.87 0 top
U$148  [SPARKX-MEDIUM]  30.99,70.87 0 bottom
U$149  [1_#F9]  77.47,78.49 0 top
U$150  [1_KOHM7]  76.45,60.71 0 top
U$151  [10_#F8]  76.96,75.95 0 top
U$152  [10_MOHM6]  75.69,55.63 0 top
U$153  [GND0]  83.57,49.53 90 top
U$154  [GND0]  83.57,49.53 90 bottom
U$155  [VIN1]  75.95,49.53 90 top
U$156  [VIN1]  75.95,49.53 90 bottom
U$157  [VMID3]  78.49,49.28 90 top
U$158  [VMID3]  78.49,49.28 90 bottom
U$159  [VOUT3]  81.03,49.4 90 top
U$160  [VOUT3]  81.03,49.4 90 bottom
U$161  [10_NF11]  76.96,81.03 0 top
U$162  [10_OHM4]  76.33,63.25 0 top
U$163  [100_KOHM10]  75.44,58.17 0 top
U$164  [C10]  73.28,87.38 0 top
U$165  [C21]  80.77,87.38 0 top
U$166  [R12]  65.79,51.31 0 top
U$167  [R23]  88.39,51.31 0 top
U$168  [_1_OHM5]  76.33,65.79 0 top
U$169  [_1_PF13]  77.22,86.11 0 top
U$170  [_100_PF12]  76.33,83.57 0 top
U$171  [CUSTOM3]  76.2,68.33 0 top
U$172  [CUSTOM3]  76.2,73.41 0 top
U$173  [C11]  84.07,59.69 0 bottom
U$174  [C20]  78.49,63.5 0 bottom
U$175  [R12]  85.03,64.2 0 bottom
U$176  [R23]  75.76,59.69 0 bottom
U$177  [VIN4]  89.92,62.61 0 bottom
U$178  [VMID5]  79.76,63.25 90 bottom
U$179  [VOUT6]  75.31,62.61 0 bottom
U$180  [CONFIGURABLE_RC_FILTER0]  71.18,70.87 0 top
U$181  [CONFIGURABLE_RC_FILTER0]  88.33,73.41 0 bottom
U$182  [STAND-OFF-TIGHT]  58.17,50.55 0 top
U$183  [STAND-OFF-TIGHT]  101.35,50.55 0 top
U$184  [SPARKX-SMALL]  60.2,70.87 0 top
U$185  [SPARKX-MEDIUM]  79.76,70.87 0 bottom
U$186  [1_#F9]  126.24,78.49 0 top
U$187  [1_KOHM7]  125.22,60.71 0 top
U$188  [10_#F8]  125.73,75.95 0 top
U$189  [10_MOHM6]  124.46,55.63 0 top
U$190  [GND0]  132.33,49.53 90 top
U$191  [GND0]  132.33,49.53 90 bottom
U$192  [VIN1]  124.71,49.53 90 top
U$193  [VIN1]  124.71,49.53 90 bottom
U$194  [VMID3]  127.25,49.28 90 top
U$195  [VMID3]  127.25,49.28 90 bottom
U$196  [VOUT3]  129.79,49.4 90 top
U$197  [VOUT3]  129.79,49.4 90 bottom
U$198  [10_NF11]  125.73,81.03 0 top
U$199  [10_OHM4]  125.09,63.25 0 top
U$200  [100_KOHM10]  124.21,58.17 0 top
U$201  [C10]  122.05,87.38 0 top
U$202  [C21]  129.54,87.38 0 top
U$203  [R12]  114.55,51.31 0 top
U$204  [R23]  137.16,51.31 0 top
U$205  [_1_OHM5]  125.09,65.79 0 top
U$206  [_1_PF13]  125.98,86.11 0 top
U$207  [_100_PF12]  125.09,83.57 0 top
U$208  [CUSTOM3]  124.97,68.33 0 top
U$209  [CUSTOM3]  124.97,73.41 0 top
U$210  [C11]  132.84,59.69 0 bottom
U$211  [C20]  127.25,63.5 0 bottom
U$212  [R12]  133.79,64.2 0 bottom
U$213  [R23]  124.52,59.69 0 bottom
U$214  [VIN4]  138.68,62.61 0 bottom
U$215  [VMID5]  128.52,63.25 90 bottom
U$216  [VOUT6]  124.08,62.61 0 bottom
U$217  [CONFIGURABLE_RC_FILTER0]  119.95,70.87 0 top
U$218  [CONFIGURABLE_RC_FILTER0]  137.1,73.41 0 bottom
U$219  [STAND-OFF-TIGHT]  106.93,50.55 0 top
U$220  [STAND-OFF-TIGHT]  150.11,50.55 0 top
U$221  [SPARKX-SMALL]  108.97,70.87 0 top
U$222  [SPARKX-MEDIUM]  128.52,70.87 0 bottom
U$223  [1_#F9]  28.7,119.63 0 top
U$224  [1_KOHM7]  27.69,101.85 0 top
U$225  [10_#F8]  28.19,117.09 0 top
U$226  [10_MOHM6]  26.92,96.77 0 top
U$227  [GND0]  34.8,90.68 90 top
U$228  [GND0]  34.8,90.68 90 bottom
U$229  [VIN1]  27.18,90.68 90 top
U$230  [VIN1]  27.18,90.68 90 bottom
U$231  [VMID3]  29.72,90.42 90 top
U$232  [VMID3]  29.72,90.42 90 bottom
U$233  [VOUT3]  32.26,90.55 90 top
U$234  [VOUT3]  32.26,90.55 90 bottom
U$235  [10_NF11]  28.19,122.17 0 top
U$236  [10_OHM4]  27.56,104.39 0 top
U$237  [100_KOHM10]  26.67,99.31 0 top
U$238  [C10]  24.51,128.52 0 top
U$239  [C21]  32,128.52 0 top
U$240  [R12]  17.02,92.46 0 top
U$241  [R23]  39.62,92.46 0 top
U$242  [_1_OHM5]  27.56,106.93 0 top
U$243  [_1_PF13]  28.45,127.25 0 top
U$244  [_100_PF12]  27.56,124.71 0 top
U$245  [CUSTOM3]  27.43,109.47 0 top
U$246  [CUSTOM3]  27.43,114.55 0 top
U$247  [C11]  35.31,100.84 0 bottom
U$248  [C20]  29.72,104.65 0 bottom
U$249  [R12]  36.26,105.35 0 bottom
U$250  [R23]  26.99,100.84 0 bottom
U$251  [VIN4]  41.15,103.76 0 bottom
U$252  [VMID5]  30.99,104.39 90 bottom
U$253  [VOUT6]  26.54,103.76 0 bottom
U$254  [CONFIGURABLE_RC_FILTER0]  22.42,112.01 0 top
U$255  [CONFIGURABLE_RC_FILTER0]  39.56,114.55 0 bottom
U$256  [STAND-OFF-TIGHT]  9.4,91.69 0 top
U$257  [STAND-OFF-TIGHT]  52.58,91.69 0 top
U$258  [SPARKX-SMALL]  11.43,112.01 0 top
U$259  [SPARKX-MEDIUM]  30.99,112.01 0 bottom
U$260  [1_#F9]  77.47,119.63 0 top
U$261  [1_KOHM7]  76.45,101.85 0 top
U$262  [10_#F8]  76.96,117.09 0 top
U$263  [10_MOHM6]  75.69,96.77 0 top
U$264  [GND0]  83.57,90.68 90 top
U$265  [GND0]  83.57,90.68 90 bottom
U$266  [VIN1]  75.95,90.68 90 top
U$267  [VIN1]  75.95,90.68 90 bottom
U$268  [VMID3]  78.49,90.42 90 top
U$269  [VMID3]  78.49,90.42 90 bottom
U$270  [VOUT3]  81.03,90.55 90 top
U$271  [VOUT3]  81.03,90.55 90 bottom
U$272  [10_NF11]  76.96,122.17 0 top
U$273  [10_OHM4]  76.33,104.39 0 top
U$274  [100_KOHM10]  75.44,99.31 0 top
U$275  [C10]  73.28,128.52 0 top
U$276  [C21]  80.77,128.52 0 top
U$277  [R12]  65.79,92.46 0 top
U$278  [R23]  88.39,92.46 0 top
U$279  [_1_OHM5]  76.33,106.93 0 top
U$280  [_1_PF13]  77.22,127.25 0 top
U$281  [_100_PF12]  76.33,124.71 0 top
U$282  [CUSTOM3]  76.2,109.47 0 top
U$283  [CUSTOM3]  76.2,114.55 0 top
U$284  [C11]  84.07,100.84 0 bottom
U$285  [C20]  78.49,104.65 0 bottom
U$286  [R12]  85.03,105.35 0 bottom
U$287  [R23]  75.76,100.84 0 bottom
U$288  [VIN4]  89.92,103.76 0 bottom
U$289  [VMID5]  79.76,104.39 90 bottom
U$290  [VOUT6]  75.31,103.76 0 bottom
U$291  [CONFIGURABLE_RC_FILTER0]  71.18,112.01 0 top
U$292  [CONFIGURABLE_RC_FILTER0]  88.33,114.55 0 bottom
U$293  [STAND-OFF-TIGHT]  58.17,91.69 0 top
U$294  [STAND-OFF-TIGHT]  101.35,91.69 0 top
U$295  [SPARKX-SMALL]  60.2,112.01 0 top
U$296  [SPARKX-MEDIUM]  79.76,112.01 0 bottom
U$297  [1_#F9]  126.24,119.63 0 top
U$298  [1_KOHM7]  125.22,101.85 0 top
U$299  [10_#F8]  125.73,117.09 0 top
U$300  [10_MOHM6]  124.46,96.77 0 top
U$301  [GND0]  132.33,90.68 90 top
U$302  [GND0]  132.33,90.68 90 bottom
U$303  [VIN1]  124.71,90.68 90 top
U$304  [VIN1]  124.71,90.68 90 bottom
U$305  [VMID3]  127.25,90.42 90 top
U$306  [VMID3]  127.25,90.42 90 bottom
U$307  [VOUT3]  129.79,90.55 90 top
U$308  [VOUT3]  129.79,90.55 90 bottom
U$309  [10_NF11]  125.73,122.17 0 top
U$310  [10_OHM4]  125.09,104.39 0 top
U$311  [100_KOHM10]  124.21,99.31 0 top
U$312  [C10]  122.05,128.52 0 top
U$313  [C21]  129.54,128.52 0 top
U$314  [R12]  114.55,92.46 0 top
U$315  [R23]  137.16,92.46 0 top
U$316  [_1_OHM5]  125.09,106.93 0 top
U$317  [_1_PF13]  125.98,127.25 0 top
U$318  [_100_PF12]  125.09,124.71 0 top
U$319  [CUSTOM3]  124.97,109.47 0 top
U$320  [CUSTOM3]  124.97,114.55 0 top
U$321  [C11]  132.84,100.84 0 bottom
U$322  [C20]  127.25,104.65 0 bottom
U$323  [R12]  133.79,105.35 0 bottom
U$324  [R23]  124.52,100.84 0 bottom
U$325  [VIN4]  138.68,103.76 0 bottom
U$326  [VMID5]  128.52,104.39 90 bottom
U$327  [VOUT6]  124.08,103.76 0 bottom
U$328  [CONFIGURABLE_RC_FILTER0]  119.95,112.01 0 top
U$329  [CONFIGURABLE_RC_FILTER0]  137.1,114.55 0 bottom
U$330  [STAND-OFF-TIGHT]  106.93,91.69 0 top
U$331  [STAND-OFF-TIGHT]  150.11,91.69 0 top
U$332  [SPARKX-SMALL]  108.97,112.01 0 top
U$333  [SPARKX-MEDIUM]  128.52,112.01 0 bottom

## Library data of the parts
C1 C7 C15 C21 C29 C35 C43 C49 C57 C63 C71 C77 C85 C91 C99 C105 C113 C119 = SparkFun-Capacitors; PROD_ID: CAP-07879
C2 C8 C16 C22 C30 C36 C44 C50 C58 C64 C72 C78 C86 C92 C100 C106 C114 C120 = SparkFun-Capacitors; PROD_ID: CAP-07883
C3 C9 C17 C23 C31 C37 C45 C51 C59 C65 C73 C79 C87 C93 C101 C107 C115 C121 = SparkFun-Capacitors; PROD_ID: CAP-00867
C4 C10 C18 C24 C32 C38 C46 C52 C60 C66 C74 C80 C88 C94 C102 C108 C116 C122 = SparkFun-Capacitors; PROD_ID: CAP-00868
C5 C11 C19 C25 C33 C39 C47 C53 C61 C67 C75 C81 C89 C95 C103 C109 C117 C123 = SparkFun-Capacitors; PROD_ID: CAP-11015
C6 C12-C14 C20 C26-C28 C34 C40-C42 C48 C54-C56 C62 C68-C70 C76 C82-C84 C90 C96-C98 C104 C110-C112 C118 C124-C126 = SparkFun-Capacitors
E$1 E$2 FD1-FD36 LOGO1-LOGO9 = SparkFun-Aesthetics
E$3 = SparkFun-Retired
J1-J9 = SparkFun-Connectors; PROD_ID: CONN-09696
R1 R7 R15 R21 R29 R35 R43 R49 R57 R63 R71 R77 R85 R91 R99 R105 R113 R119 = SparkFun-Resistors; PROD_ID: RES-08283
R2 R8 R16 R22 R30 R36 R44 R50 R58 R64 R72 R78 R86 R92 R100 R106 R114 R120 = SparkFun-Resistors; PROD_ID: RES-07828
R3 R9 R17 R23 R31 R37 R45 R51 R59 R65 R73 R79 R87 R93 R101 R107 R115 R121 = SparkFun-Resistors; PROD_ID: RES-07856
R4 R12-R14 R20 R26-R28 R34 R40-R42 R48 R54-R56 R62 R68-R70 R76 R82-R84 R90 R96-R98 R104 R110-R112 R118 R124-R126 = SparkFun-Resistors
R5 R10 R18 R24 R32 R38 R46 R52 R60 R66 R74 R80 R88 R94 R102 R108 R116 R122 = SparkFun-Resistors; PROD_ID: RES-08269
R6 R11 R19 R25 R33 R39 R47 R53 R61 R67 R75 R81 R89 R95 R103 R109 R117 R123 = SparkFun-Resistors; PROD_ID: RES-12581
SW1-SW36 = SparkFun-Switches; PROD_ID: SWCH-13756
U$1-U$4 U$13-U$22 U$38-U$41 U$50-U$59 U$75-U$78 U$87-U$96 U$112-U$115 U$124-U$133 U$149-U$152 U$161-U$170 U$186-U$189 U$198-U$207 U$223-U$226 U$235-U$244 U$260-U$263 U$272-U$281 U$297-U$300 U$309-U$318 = buzzard_labels (6)
U$5-U$10 U$42-U$47 U$79-U$84 U$116-U$121 U$153-U$158 U$190-U$195 U$227-U$232 U$264-U$269 U$301-U$306 = buzzard_labels (7)
U$11 U$12 U$48 U$49 U$85 U$86 U$122 U$123 U$159 U$160 U$196 U$197 U$233 U$234 U$270 U$271 U$307 U$308 = buzzard_labels (8)
U$23 U$24 U$60 U$61 U$97 U$98 U$134 U$135 U$171 U$172 U$208 U$209 U$245 U$246 U$282 U$283 U$319 U$320 = buzzard_labels (10)
U$25-U$31 U$62-U$68 U$99-U$105 U$136-U$142 U$173-U$179 U$210-U$216 U$247-U$253 U$284-U$290 U$321-U$327 = buzzard_labels (11)
U$32 U$33 U$69 U$70 U$106 U$107 U$143 U$144 U$180 U$181 U$217 U$218 U$254 U$255 U$291 U$292 U$328 U$329 = buzzard_labels (12)
U$34 U$35 U$71 U$72 U$108 U$109 U$145 U$146 U$182 U$183 U$219 U$220 U$256 U$257 U$293 U$294 U$330 U$331 = SparkFun-Hardware
U$36 U$37 U$73 U$74 U$110 U$111 U$147 U$148 U$184 U$185 U$221 U$222 U$258 U$259 U$295 U$296 U$332 U$333 = SparkX

## Nets
GND: C1.2 C2.2 C3.2 C4.2 C5.2 C6.- C14.2 J1.1 R7.1 R8.1 R9.1 R10.1 R11.1 R12.P$1 R13.1
GND1: C15.2 C16.2 C17.2 C18.2 C19.2 C20.- C28.2 J2.1 R21.1 R22.1 R23.1 R24.1 R25.1 R26.P$1 R27.1
GND2: C29.2 C30.2 C31.2 C32.2 C33.2 C34.- C42.2 J3.1 R35.1 R36.1 R37.1 R38.1 R39.1 R40.P$1 R41.1
GND3: C43.2 C44.2 C45.2 C46.2 C47.2 C48.- C56.2 J4.1 R49.1 R50.1 R51.1 R52.1 R53.1 R54.P$1 R55.1
GND4: C57.2 C58.2 C59.2 C60.2 C61.2 C62.- C70.2 J5.1 R63.1 R64.1 R65.1 R66.1 R67.1 R68.P$1 R69.1
GND5: C71.2 C72.2 C73.2 C74.2 C75.2 C76.- C84.2 J6.1 R77.1 R78.1 R79.1 R80.1 R81.1 R82.P$1 R83.1
GND6: C85.2 C86.2 C87.2 C88.2 C89.2 C90.- C98.2 J7.1 R91.1 R92.1 R93.1 R94.1 R95.1 R96.P$1 R97.1
GND7: C99.2 C100.2 C101.2 C102.2 C103.2 C104.- C112.2 J8.1 R105.1 R106.1 R107.1 R108.1 R109.1 R110.P$1 R111.1
GND8: C113.2 C114.2 C115.2 C116.2 C117.2 C118.- C126.2 J9.1 R119.1 R120.1 R121.1 R122.1 R123.1 R124.P$1 R125.1
N$1: R1.1 SW1.12
N$2: R2.1 SW1.11
N$3: C1.1 SW2.7
N$4: R3.1 SW1.10
N$5: R6.1 SW1.9
N$6: R5.1 SW1.8
N$7: R4.P$1 R14.1 SW1.7
N$8: C2.1 SW2.8
N$9: C3.1 SW2.9
N$10: C4.1 SW2.10
N$11: C5.1 SW2.11
N$12: C6.+ C14.1 SW2.12
N$13: C12.+ C13.2 SW3.7
N$14: C11.2 SW3.8
N$15: C10.2 SW3.9
N$16: C9.2 SW3.10
N$17: C8.2 SW3.11
N$18: C7.2 SW3.12
N$19: R7.2 SW4.7
N$20: R8.2 SW4.8
N$21: R9.2 SW4.9
N$22: R12.P$2 R13.2 SW4.12
N$23: R10.2 SW4.11
N$24: R11.2 SW4.10
N$25: R15.1 SW5.12
N$26: R16.1 SW5.11
N$27: R17.1 SW5.10
N$28: R19.1 SW5.9
N$29: R18.1 SW5.8
N$30: R20.P$1 R28.1 SW5.7
N$31: C15.1 SW6.7
N$32: C16.1 SW6.8
N$33: C17.1 SW6.9
N$34: C18.1 SW6.10
N$35: C19.1 SW6.11
N$36: C20.+ C28.1 SW6.12
N$37: R21.2 SW8.7
N$38: R22.2 SW8.8
N$39: R23.2 SW8.9
N$40: R26.P$2 R27.2 SW8.12
N$41: R24.2 SW8.11
N$42: R25.2 SW8.10
N$43: C26.+ C27.2 SW7.7
N$44: C25.2 SW7.8
N$45: C24.2 SW7.9
N$46: C23.2 SW7.10
N$47: C22.2 SW7.11
N$48: C21.2 SW7.12
N$49: R29.1 SW9.12
N$50: R30.1 SW9.11
N$51: R31.1 SW9.10
N$52: R33.1 SW9.9
N$53: R32.1 SW9.8
N$54: R34.P$1 R42.1 SW9.7
N$55: C29.1 SW10.7
N$56: C30.1 SW10.8
N$57: C31.1 SW10.9
N$58: C32.1 SW10.10
N$59: C33.1 SW10.11
N$60: C34.+ C42.1 SW10.12
N$61: R35.2 SW12.7
N$62: R36.2 SW12.8
N$63: R37.2 SW12.9
N$64: R40.P$2 R41.2 SW12.12
N$65: R38.2 SW12.11
N$66: R39.2 SW12.10
N$67: C40.+ C41.2 SW11.7
N$68: C39.2 SW11.8
N$69: C38.2 SW11.9
N$70: C37.2 SW11.10
N$71: C36.2 SW11.11
N$72: C35.2 SW11.12
N$73: R43.1 SW13.12
N$74: R44.1 SW13.11
N$75: R45.1 SW13.10
N$76: R47.1 SW13.9
N$77: R46.1 SW13.8
N$78: R48.P$1 R56.1 SW13.7
N$79: C43.1 SW14.7
N$80: C44.1 SW14.8
N$81: C45.1 SW14.9
N$82: C46.1 SW14.10
N$83: C47.1 SW14.11
N$84: C48.+ C56.1 SW14.12
N$85: R49.2 SW16.7
N$86: R50.2 SW16.8
N$87: R51.2 SW16.9
N$88: R54.P$2 R55.2 SW16.12
N$89: R52.2 SW16.11
N$90: R53.2 SW16.10
N$91: C54.+ C55.2 SW15.7
N$92: C53.2 SW15.8
N$93: C52.2 SW15.9
N$94: C51.2 SW15.10
N$95: C50.2 SW15.11
N$96: C49.2 SW15.12
N$97: R57.1 SW17.12
N$98: R58.1 SW17.11
N$99: R59.1 SW17.10
N$100: R61.1 SW17.9
N$101: R60.1 SW17.8
N$102: R62.P$1 R70.1 SW17.7
N$103: C57.1 SW18.7
N$104: C58.1 SW18.8
N$105: C59.1 SW18.9
N$106: C60.1 SW18.10
N$107: C61.1 SW18.11
N$108: C62.+ C70.1 SW18.12
N$109: R63.2 SW20.7
N$110: R64.2 SW20.8
N$111: R65.2 SW20.9
N$112: R68.P$2 R69.2 SW20.12
N$113: R66.2 SW20.11
N$114: R67.2 SW20.10
N$115: C68.+ C69.2 SW19.7
N$116: C67.2 SW19.8
N$117: C66.2 SW19.9
N$118: C65.2 SW19.10
N$119: C64.2 SW19.11
N$120: C63.2 SW19.12
N$121: R71.1 SW21.12
N$122: R72.1 SW21.11
N$123: R73.1 SW21.10
N$124: R75.1 SW21.9
N$125: R74.1 SW21.8
N$126: R76.P$1 R84.1 SW21.7
N$127: C71.1 SW22.7
N$128: C72.1 SW22.8
N$129: C73.1 SW22.9
N$130: C74.1 SW22.10
N$131: C75.1 SW22.11
N$132: C76.+ C84.1 SW22.12
N$133: R77.2 SW24.7
N$134: R78.2 SW24.8
N$135: R79.2 SW24.9
N$136: R82.P$2 R83.2 SW24.12
N$137: R80.2 SW24.11
N$138: R81.2 SW24.10
N$139: C82.+ C83.2 SW23.7
N$140: C81.2 SW23.8
N$141: C80.2 SW23.9
N$142: C79.2 SW23.10
N$143: C78.2 SW23.11
N$144: C77.2 SW23.12
N$145: R85.1 SW25.12
N$146: R86.1 SW25.11
N$147: R87.1 SW25.10
N$148: R89.1 SW25.9
N$149: R88.1 SW25.8
N$150: R90.P$1 R98.1 SW25.7
N$151: C85.1 SW26.7
N$152: C86.1 SW26.8
N$153: C87.1 SW26.9
N$154: C88.1 SW26.10
N$155: C89.1 SW26.11
N$156: C90.+ C98.1 SW26.12
N$157: R91.2 SW28.7
N$158: R92.2 SW28.8
N$159: R93.2 SW28.9
N$160: R96.P$2 R97.2 SW28.12
N$161: R94.2 SW28.11
N$162: R95.2 SW28.10
N$163: C96.+ C97.2 SW27.7
N$164: C95.2 SW27.8
N$165: C94.2 SW27.9
N$166: C93.2 SW27.10
N$167: C92.2 SW27.11
N$168: C91.2 SW27.12
N$169: R99.1 SW29.12
N$170: R100.1 SW29.11
N$171: R101.1 SW29.10
N$172: R103.1 SW29.9
N$173: R102.1 SW29.8
N$174: R104.P$1 R112.1 SW29.7
N$175: C99.1 SW30.7
N$176: C100.1 SW30.8
N$177: C101.1 SW30.9
N$178: C102.1 SW30.10
N$179: C103.1 SW30.11
N$180: C104.+ C112.1 SW30.12
N$181: R105.2 SW32.7
N$182: R106.2 SW32.8
N$183: R107.2 SW32.9
N$184: R110.P$2 R111.2 SW32.12
N$185: R108.2 SW32.11
N$186: R109.2 SW32.10
N$187: C110.+ C111.2 SW31.7
N$188: C109.2 SW31.8
N$189: C108.2 SW31.9
N$190: C107.2 SW31.10
N$191: C106.2 SW31.11
N$192: C105.2 SW31.12
N$193: R113.1 SW33.12
N$194: R114.1 SW33.11
N$195: R115.1 SW33.10
N$196: R117.1 SW33.9
N$197: R116.1 SW33.8
N$198: R118.P$1 R126.1 SW33.7
N$199: C113.1 SW34.7
N$200: C114.1 SW34.8
N$201: C115.1 SW34.9
N$202: C116.1 SW34.10
N$203: C117.1 SW34.11
N$204: C118.+ C126.1 SW34.12
N$205: R119.2 SW36.7
N$206: R120.2 SW36.8
N$207: R121.2 SW36.9
N$208: R124.P$2 R125.2 SW36.12
N$209: R122.2 SW36.11
N$210: R123.2 SW36.10
N$211: C124.+ C125.2 SW35.7
N$212: C123.2 SW35.8
N$213: C122.2 SW35.9
N$214: C121.2 SW35.10
N$215: C120.2 SW35.11
N$216: C119.2 SW35.12
VDDA: J1.3 R1.2 R2.2 R3.2 R4.P$2 R5.2 R6.2 R14.2 SW2.1 SW2.2 SW2.3 SW2.4 SW2.5 SW2.6 SW3.1 SW3.2 SW3.3 SW3.4 SW3.5 SW3.6
VDDA1: J2.3 R15.2 R16.2 R17.2 R18.2 R19.2 R20.P$2 R28.2 SW6.1 SW6.2 SW6.3 SW6.4 SW6.5 SW6.6 SW7.1 SW7.2 SW7.3 SW7.4 SW7.5 SW7.6
VDDA2: J3.3 R29.2 R30.2 R31.2 R32.2 R33.2 R34.P$2 R42.2 SW10.1 SW10.2 SW10.3 SW10.4 SW10.5 SW10.6 SW11.1 SW11.2 SW11.3 SW11.4 SW11.5 SW11.6
VDDA3: J4.3 R43.2 R44.2 R45.2 R46.2 R47.2 R48.P$2 R56.2 SW14.1 SW14.2 SW14.3 SW14.4 SW14.5 SW14.6 SW15.1 SW15.2 SW15.3 SW15.4 SW15.5 SW15.6
VDDA4: J5.3 R57.2 R58.2 R59.2 R60.2 R61.2 R62.P$2 R70.2 SW18.1 SW18.2 SW18.3 SW18.4 SW18.5 SW18.6 SW19.1 SW19.2 SW19.3 SW19.4 SW19.5 SW19.6
VDDA5: J6.3 R71.2 R72.2 R73.2 R74.2 R75.2 R76.P$2 R84.2 SW22.1 SW22.2 SW22.3 SW22.4 SW22.5 SW22.6 SW23.1 SW23.2 SW23.3 SW23.4 SW23.5 SW23.6
VDDA6: J7.3 R85.2 R86.2 R87.2 R88.2 R89.2 R90.P$2 R98.2 SW26.1 SW26.2 SW26.3 SW26.4 SW26.5 SW26.6 SW27.1 SW27.2 SW27.3 SW27.4 SW27.5 SW27.6
VDDA7: J8.3 R99.2 R100.2 R101.2 R102.2 R103.2 R104.P$2 R112.2 SW30.1 SW30.2 SW30.3 SW30.4 SW30.5 SW30.6 SW31.1 SW31.2 SW31.3 SW31.4 SW31.5 SW31.6
VDDA8: J9.3 R113.2 R114.2 R115.2 R116.2 R117.2 R118.P$2 R126.2 SW34.1 SW34.2 SW34.3 SW34.4 SW34.5 SW34.6 SW35.1 SW35.2 SW35.3 SW35.4 SW35.5 SW35.6
VIN: J1.4 SW1.1 SW1.2 SW1.3 SW1.4 SW1.5 SW1.6
VIN1: J2.4 SW5.1 SW5.2 SW5.3 SW5.4 SW5.5 SW5.6
VIN2: J3.4 SW9.1 SW9.2 SW9.3 SW9.4 SW9.5 SW9.6
VIN3: J4.4 SW13.1 SW13.2 SW13.3 SW13.4 SW13.5 SW13.6
VIN4: J5.4 SW17.1 SW17.2 SW17.3 SW17.4 SW17.5 SW17.6
VIN5: J6.4 SW21.1 SW21.2 SW21.3 SW21.4 SW21.5 SW21.6
VIN6: J7.4 SW25.1 SW25.2 SW25.3 SW25.4 SW25.5 SW25.6
VIN7: J8.4 SW29.1 SW29.2 SW29.3 SW29.4 SW29.5 SW29.6
VIN8: J9.4 SW33.1 SW33.2 SW33.3 SW33.4 SW33.5 SW33.6
VOUT: C7.1 C8.1 C9.1 C10.1 C11.1 C12.- C13.1 J1.2 SW4.1 SW4.2 SW4.3 SW4.4 SW4.5 SW4.6
VOUT1: C21.1 C22.1 C23.1 C24.1 C25.1 C26.- C27.1 J2.2 SW8.1 SW8.2 SW8.3 SW8.4 SW8.5 SW8.6
VOUT2: C35.1 C36.1 C37.1 C38.1 C39.1 C40.- C41.1 J3.2 SW12.1 SW12.2 SW12.3 SW12.4 SW12.5 SW12.6
VOUT3: C49.1 C50.1 C51.1 C52.1 C53.1 C54.- C55.1 J4.2 SW16.1 SW16.2 SW16.3 SW16.4 SW16.5 SW16.6
VOUT4: C63.1 C64.1 C65.1 C66.1 C67.1 C68.- C69.1 J5.2 SW20.1 SW20.2 SW20.3 SW20.4 SW20.5 SW20.6
VOUT5: C77.1 C78.1 C79.1 C80.1 C81.1 C82.- C83.1 J6.2 SW24.1 SW24.2 SW24.3 SW24.4 SW24.5 SW24.6
VOUT6: C91.1 C92.1 C93.1 C94.1 C95.1 C96.- C97.1 J7.2 SW28.1 SW28.2 SW28.3 SW28.4 SW28.5 SW28.6
VOUT7: C105.1 C106.1 C107.1 C108.1 C109.1 C110.- C111.1 J8.2 SW32.1 SW32.2 SW32.3 SW32.4 SW32.5 SW32.6
VOUT8: C119.1 C120.1 C121.1 C122.1 C123.1 C124.- C125.1 J9.2 SW36.1 SW36.2 SW36.3 SW36.4 SW36.5 SW36.6